# Altium PCB pay-motors-prototype.PcbDoc (part 1 of 2)
Units mm, origin at the board's own origin, x right, y up, seen from the top; angles counter-clockwise.
Board outline 81 x 46.01 mm, 4 copper layers (Top Layer, GND, PWR, Bottom Layer), stack 0.778 mm thick; 77 components, 99 nets, 310 pads, 335 vias.
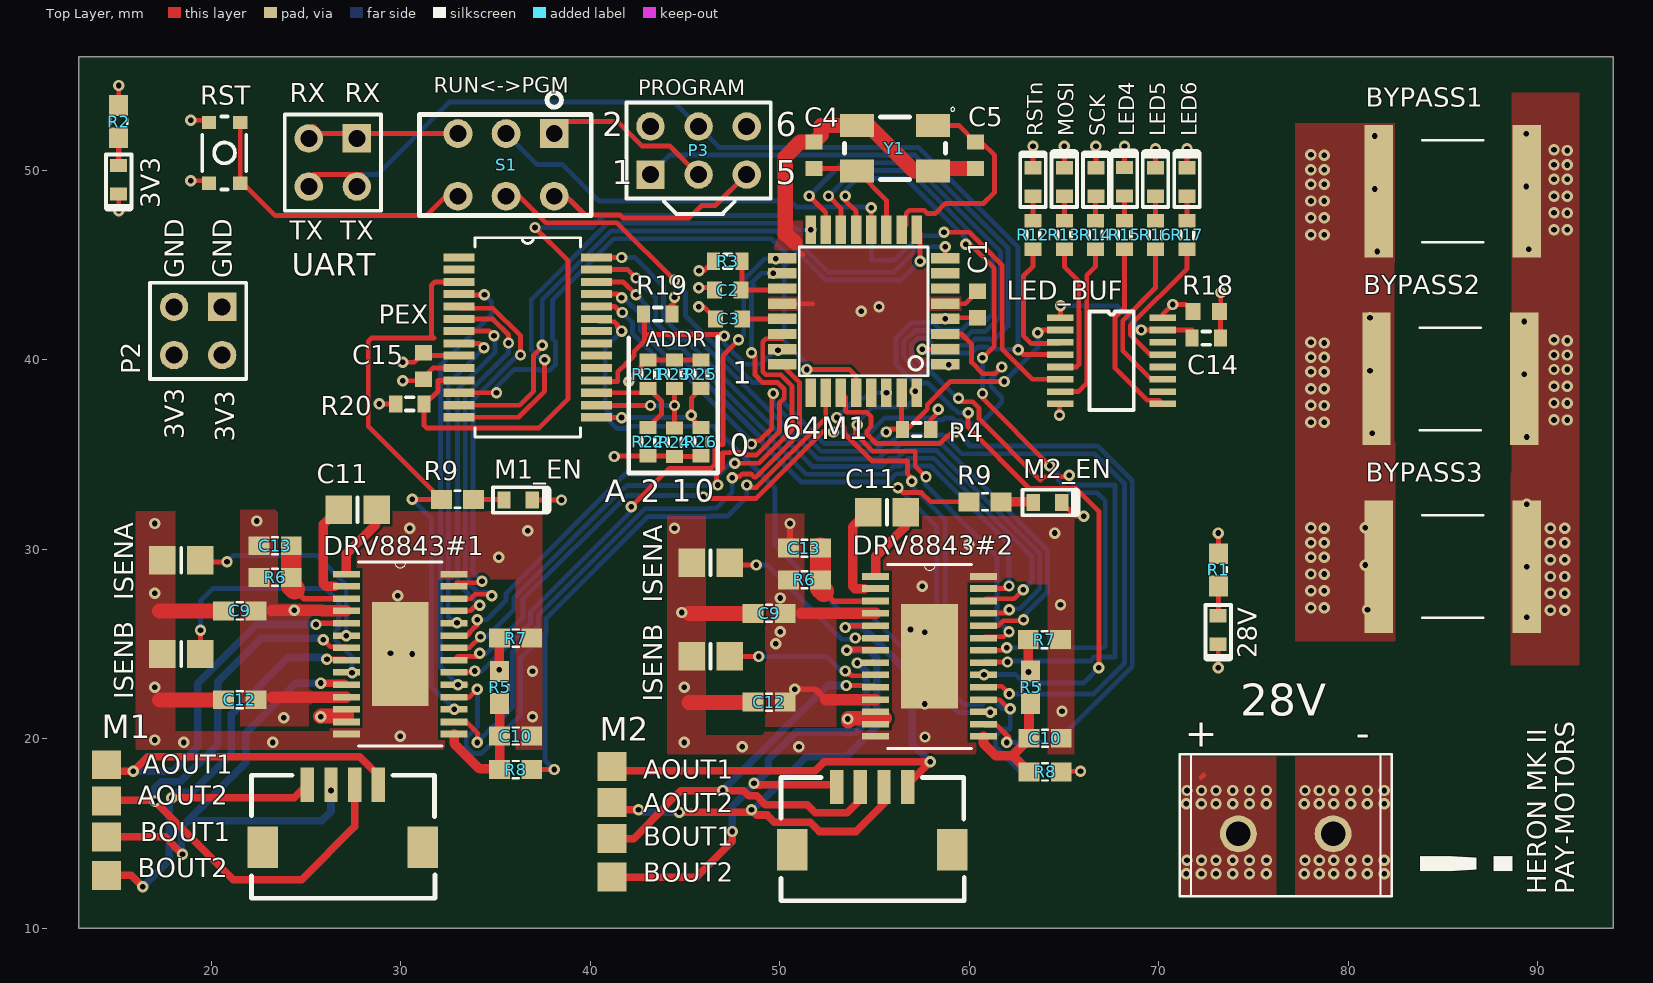
[diagram p0: Top Layer view]
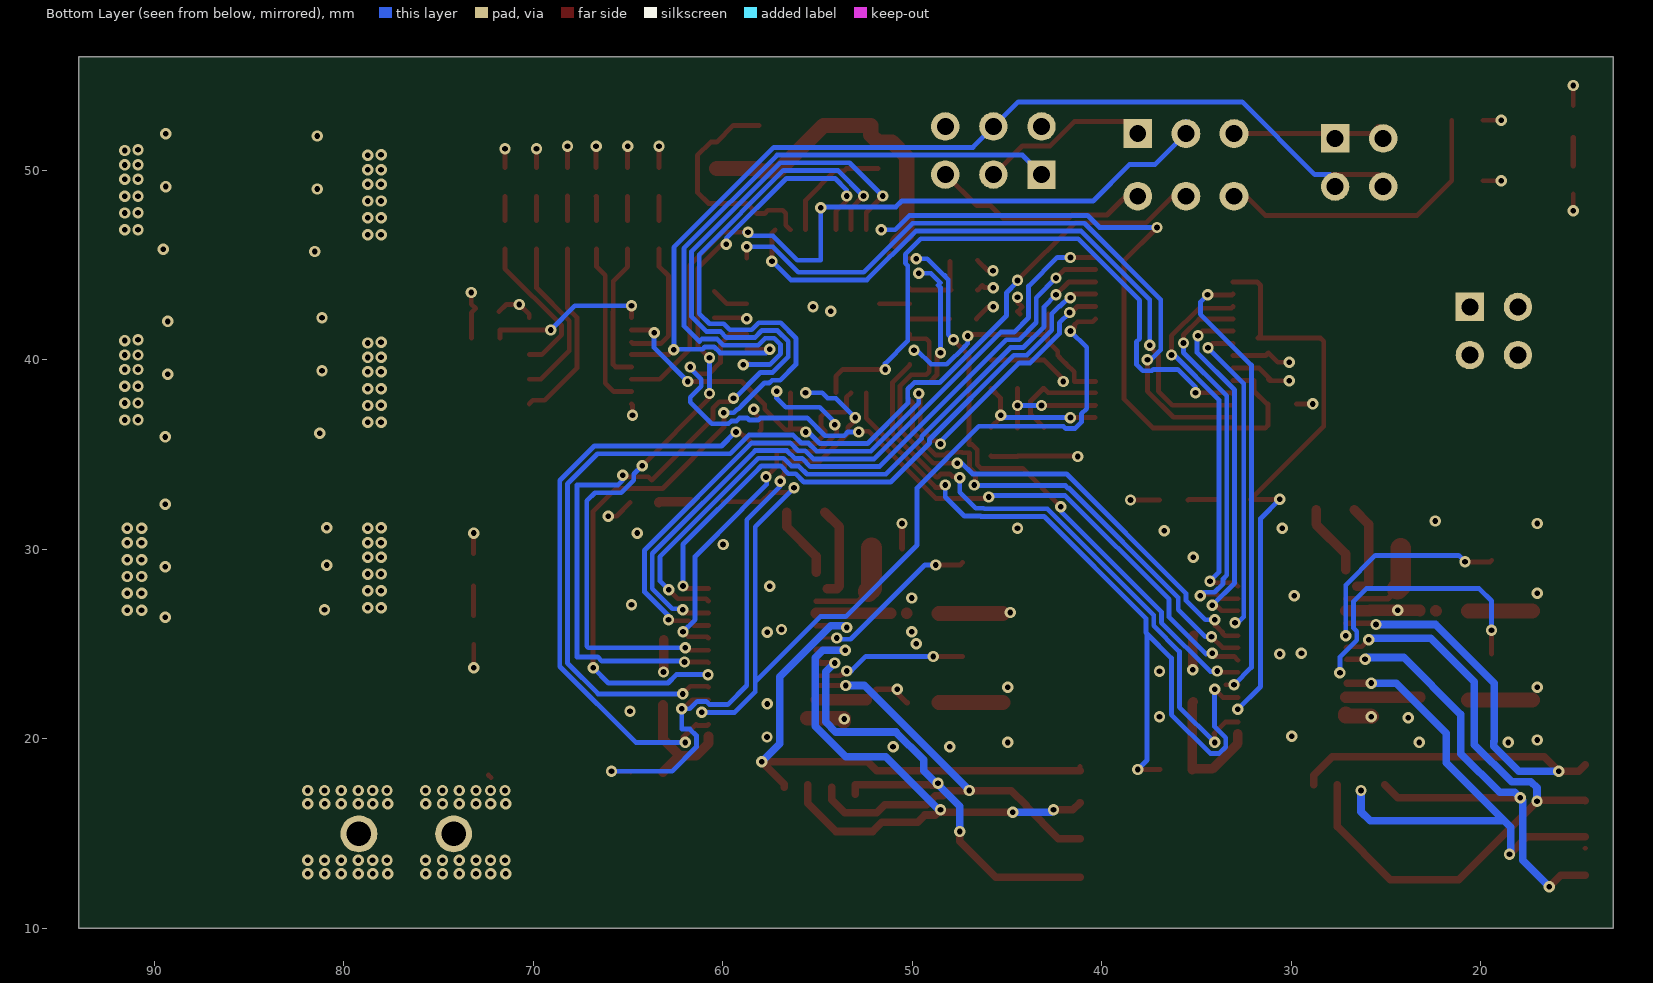
[diagram p1: Bottom Layer view, seen from below]
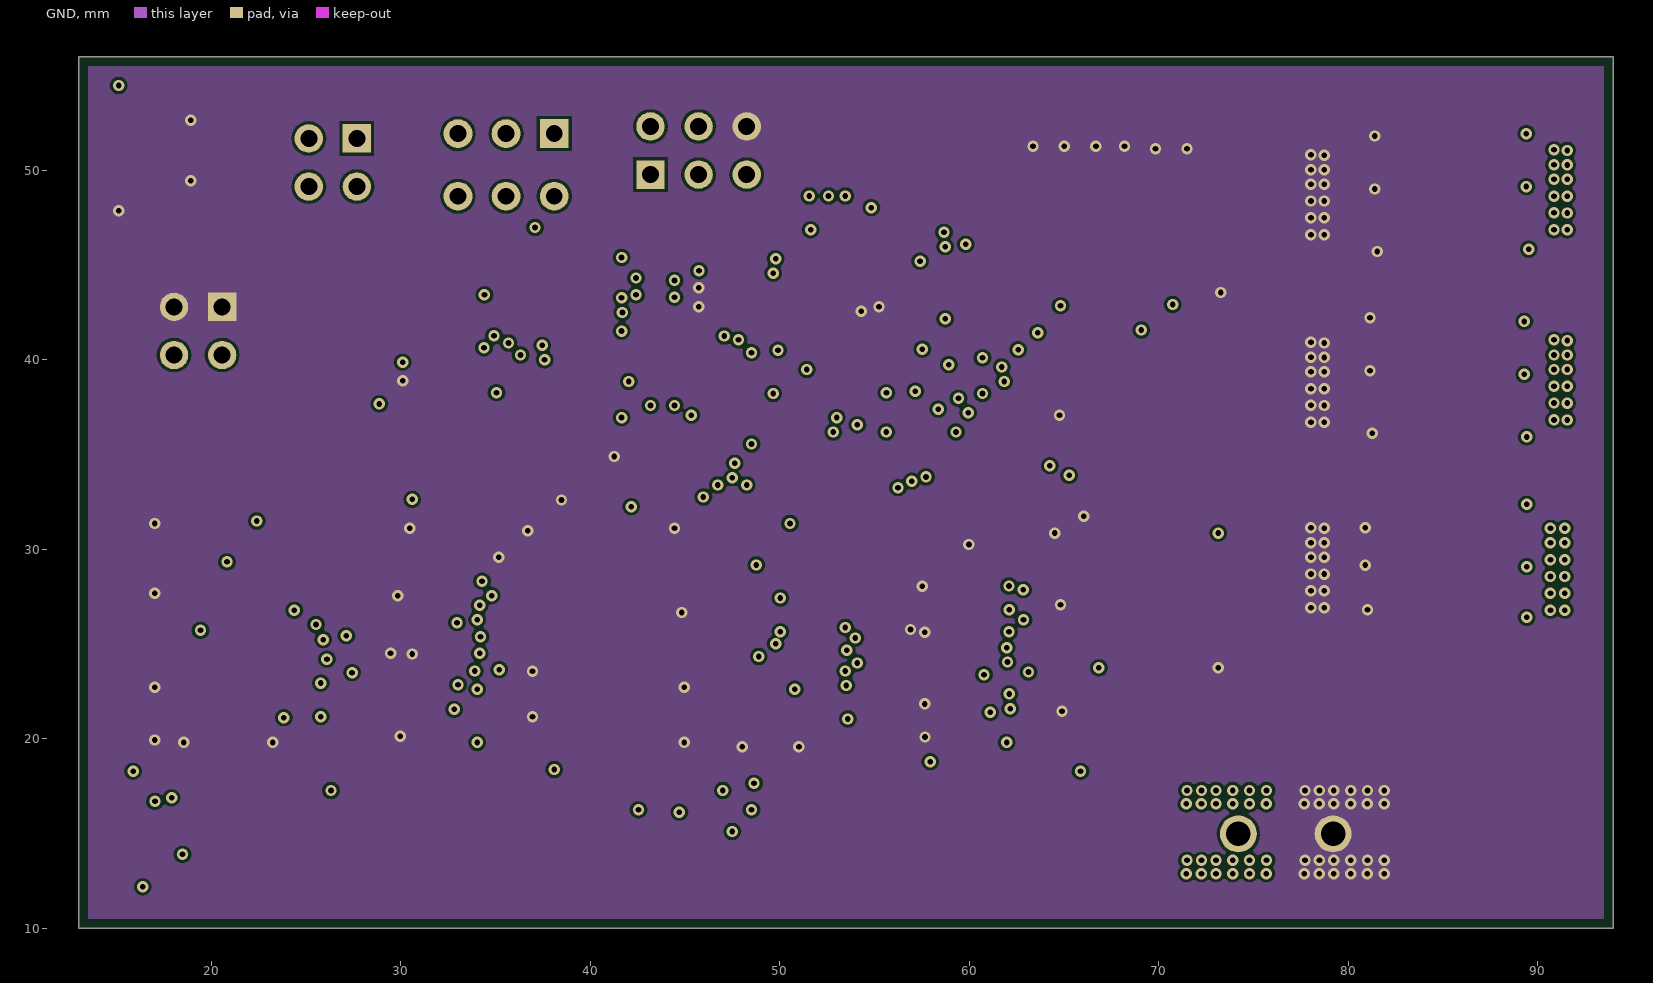
[diagram p2: GND]
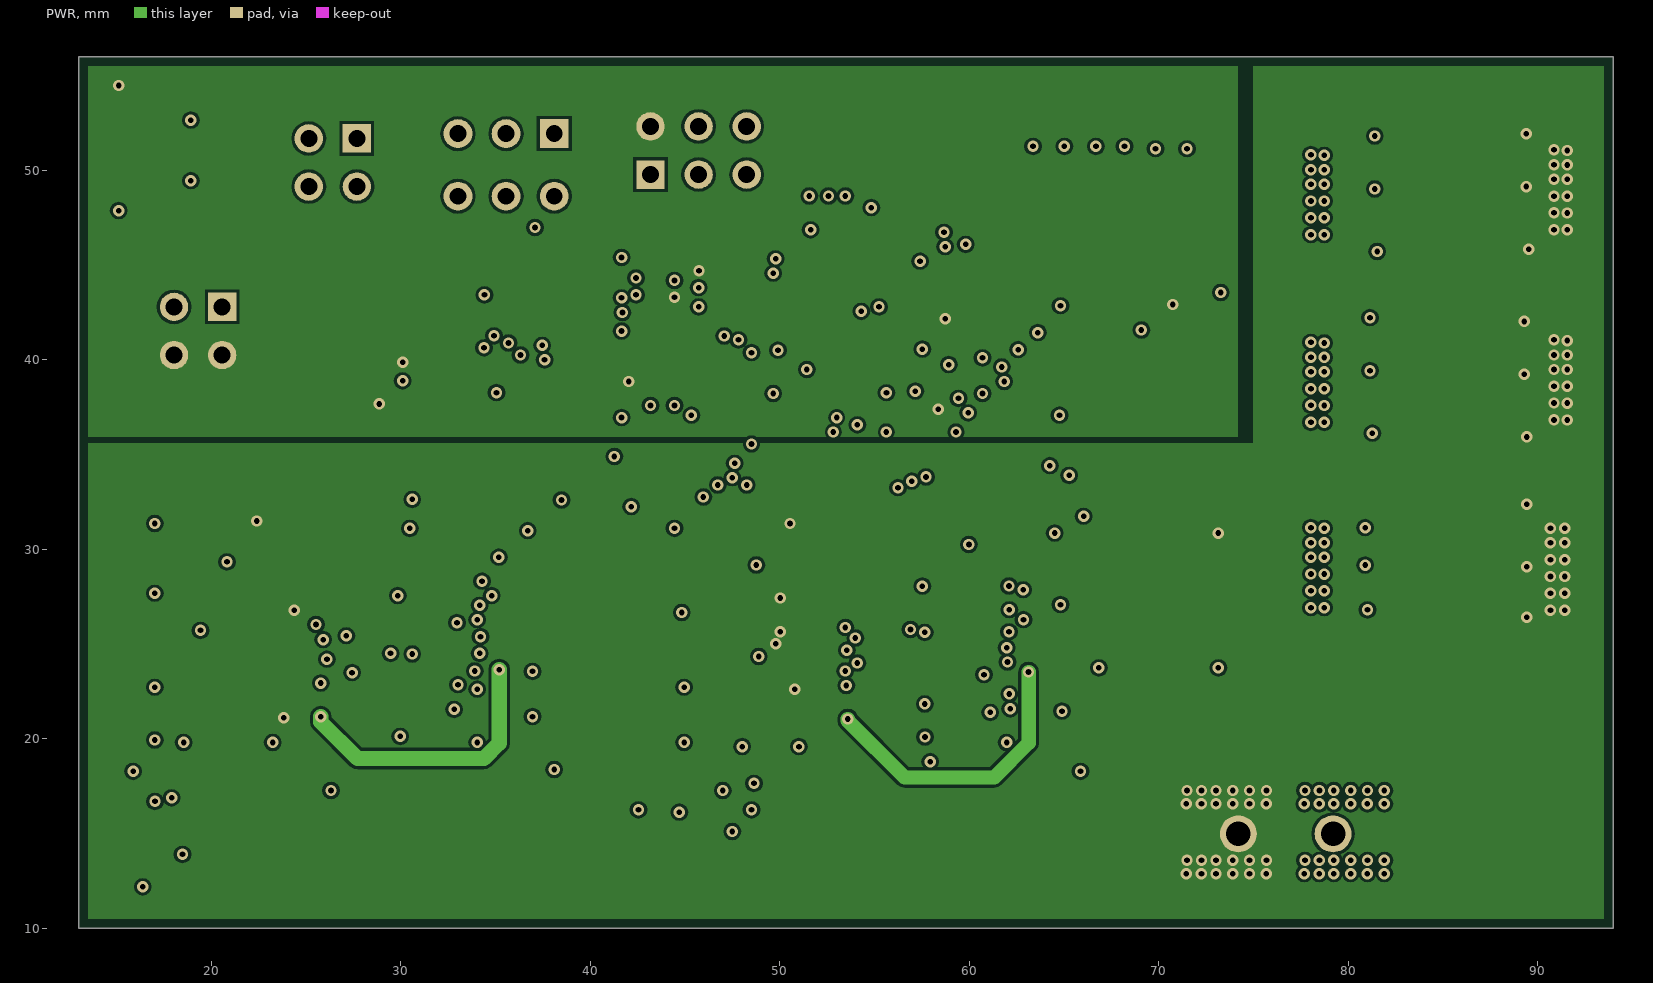
[diagram p3: PWR]

## Layer stack, top to bottom
Top Solder: solder mask 0.0102, Solder Resist, Dk 3.5
Top Layer: signal copper 0.0356
Dielectric 1: core 0.254, FR-4, Dk 4.2
GND: signal copper 0.036
Dielectric 2: prepreg 0.127, Dk 4.2
PWR: signal copper 0.036
Dielectric 3: core 0.254, Dk 4.2
Bottom Layer: signal copper 0.0356
Bottom Solder: solder mask 0.0102, Solder Resist, Dk 3.5

## Board outline
13,56.007 94,56.007 94,10 13,10

## Design rules (kind name [scope] priority, off if disabled: settings)
AssemblyTestPointUsage [All] p1 off:
AssemblyTestpoint [All] p1 off: testpointundercomponent=TRUE minsize=1.016 maxsize=2.54 preferedsize=1.524 minholesize=0 maxholesize=1.016 preferedholesize=0.813 testpointgrid=0.025 usegrid=TRUE gridtolerance=0 allowsidetop=TRUE allowsidebottom=TRUE
BoardOutlineClearance [All] p1: gap=0.5 ignorepadtopadclearanceinfootprint=FALSE
Clearance Component_Clearance [IsComponent vs IsComponent] p1: gap=0.254 ignorepadtopadclearanceinfootprint=FALSE
Clearance [All] p2: gap=0.152 ignorepadtopadclearanceinfootprint=TRUE
FabricationTestPointUsage [All] p1 off: valid=0 allowmultiple=FALSE
FabricationTestpoint [All] p1 off: side=3 testpointundercomponent=FALSE minsize=1.016 maxsize=2.54 preferedsize=1.524 minholesize=0 maxholesize=1.016 preferedholesize=0.813 testpointgrid=0.025 allowsidetop=TRUE allowsidebottom=TRUE usegrid=TRUE gridtolerance=0
HoleSize [All] p1: absolutevalues=TRUE maxlimit=6.3 minlimit=0.3 maxpercent=80.000 minpercent=20.000
HoleToHoleClearance [All] p1: gap=0.2 allowstackedmicrovias=FALSE
MinimumAnnularRing [All] p1: minimumring=0.15
MinimumSolderMaskSliver [All] p1: minsoldermaskwidth=0.1
PlaneClearance [All] p1: clearance=0.381
PlaneConnect [All] p1: planeconnectstyle=Direct reliefexpansion=0.508 reliefentries=4 reliefconductorwidth=0.254 reliefairgap=0.254
PolygonConnect [All] p1: connectstyle=Direct reliefconductorwidth=0.254 reliefentries=4 polygonreliefangle="90 Angle" airgapwidth=0.254
RoutingVias [All] p1: holewidth=0.3 width=0.6 viastyle="Through Hole" minholewidth=0.2 minwidth=0.6 maxholewidth=6.3 maxwidth=10 useviatemplates=TRUE viatemplateguid#1={ACB9D9EC-30E1-44E4-8670-A46DB4D8A4FC} viatemplatename#1=v60h30m0mx0(Tol8-8)
SilkToSilkClearance [All] p1: silktosilkclearance=0
SilkToSolderMaskClearance [IsPad] p1: minsilkscreentomaskgap=0.2 clearancetoexposedcopper=TRUE
SolderMaskExpansion [All] p1: expansion=0.051
UnConnectedPin [All] p1:
UnRoutedNet [All] p1: checkbadconnections=TRUE
Width [All] p1: maxlimit=25.4 minlimit=0.152 preferedwidth=0.2
18 further rules are at their usual default settings.

## Classes and differential pairs
component class DRV8843N2: C9 C10 C11 C12 C12_DRV8843N2 C13 C13_DRV8843N2 DRV8843#2 ISENA ISENB M2 M2_EN R5 R6 R7 R8 R9
component class DRV8843N1: BYPASS2 C9 C10 C11 C12 C12_DRV8843N1 C13 C13_DRV8843N1 DRV8843#1 ISENB M1 M1_EN R5 R6 R7 R8 R9
channel class 28V-motor-driver: 43N1 43N2
component class U_micro-ATMEGA32M1: P3 P4 P? RST RST1 S1 S2 S? UART
component class PEX2: C15 C21 PEX R19 R20 R21 R22 R23 R24 R25 R26 R32 R35 R36 R37 R38 R39 R40 R41 R42 R43 U4_PEX2 U11
component class pay-motors-prototype: 3V3 5 17 23 25 26 27 28V D13 gnd GND1 GND3 GND4 P2 R1 R2 R43
component class micro-circuit-: 9 BUF1 C13 C14 C26 D5 D6 D7 D8 D9 D? LED4 LED5 LED6 LED_BUF MOSI R12 R13 R14 R15 R16 R17 R18 R44 R? RSTn SCK
component class ATMega32M1: 6 C2 C3 C4 C5 C19 C25 C? R3 R4 Y1 Y?

## Components (designator, comment, footprint, x,y, rotation, side; value= is the part's Value field where it differs from the comment)
3V3 "LED2" 0603-LED 15.113,49.512 r270 top (schematic designator D2)
28V "Header 2" CON2_SCREW_5.00MM_691102710002 76.708,14.986 r0 top (schematic designator P1)
28V "LED2" 0603-LED 73.144,25.748 r270 top (schematic designator D1)
64M1 "ATMega32M1" QFP80P900X900X120-32 54.433,42.568 r180 top (schematic designator U1)
BYPASS1 "47uF" "CAP-2 J-lead" 85.598,48.895 r180 top value=0.1uF (schematic designator C8)
BYPASS2 "47uF" "CAP-2 J-lead" 85.471,38.989 r180 top value=0.1uF (schematic designator C6)
BYPASS3 "47uF" "CAP-2 J-lead" 85.598,29.083 r180 top value=0.1uF (schematic designator C7)
C1 "0.1uF" 1608[0603] 60.452,42.926 r270 top
C2 "0.1uF" 1608[0603] 47.258,43.684 r0 top value=100nF
C3 "0.1uF" 1608[0603] 47.32,42.168 r180 top
C4 "15pF 1%" 1608[0603] 51.816,50.8 r270 top value="14pF 1%"
C5 "15pF 1%" 1608[0603] 60.325,50.8 r90 top value="14pF 1%"
C9 "0.1uF" 0603-RES 21.502,26.752 r180 top
C9 "0.1uF" 0603-RES 49.442,26.625 r180 top
C10 "Cap" 0603-RES 64.008,20.033 r0 top value=0.47uF
C10 "Cap" 0603-RES 36.068,20.151 r0 top value=0.47uF
C11 "0805" 6-0805_M 55.665,31.971 r180 top value=0.01uF
C11 "0805" 6-0805_M 27.725,32.098 r180 top value=0.01uF
C12 "Cap" 0603-RES 49.442,21.938 r180 top value=0.1uF
C12 "Cap" 0603-RES 21.502,22.065 r180 top value=0.1uF
C13 "0603" 0603-RES 51.308,30.066 r0 top value=0.01uF
C13 "0603" 0603-RES 23.368,30.193 r0 top value=0.01uF
C14 "0.1uF" 1608[0603] 72.517,42.545 r180 top
C15 "0.1uF" 1608[0603] 31.209,39.679 r90 top
DRV8843#1 "DRV8843" SOP65P640X110-29N 29.972,24.478 r0 top (schematic designator U2)
DRV8843#2 "DRV8843" SOP65P640X110-29N 57.912,24.351 r0 top (schematic designator U2)
ISENA "Res1" 6-0805_M 46.355,29.304 r180 top value=1 (schematic designator R10)
ISENA "Res1" 6-0805_M 18.415,29.431 r180 top value=1 (schematic designator R10)
ISENB "Res1" 6-0805_M 46.355,24.351 r180 top value=1 (schematic designator R11)
ISENB "Res1" 6-0805_M 18.415,24.478 r180 top value=1 (schematic designator R11)
LED4 "" 0603-LED 68.199,49.403 r90 top (schematic designator D7)
LED5 "" 0603-LED 69.835,49.391 r90 top (schematic designator D8)
LED6 "" 0603-LED 71.501,49.391 r90 top (schematic designator D9)
LED_BUF "Hex Buffer" SOP65P640X120-16N 64.819,42.229 r0 top (schematic designator U3)
M1 "Header 4" DF13A-4P-1.25H(51) 28.194,15.621 r180 top (schematic designator P5)
M1_EN "LED2" 0603-LED 36.195,32.606 r0 top (schematic designator D3)
M2 "Header 4" DF13A-4P-1.25H(51) 56.134,15.494 r180 top (schematic designator P5)
M2_EN "LED2" 0603-LED 64.135,32.479 r0 top (schematic designator D3)
MOSI "ORANGE LED" 0603-LED 65.024,49.391 r90 top (schematic designator D5)
P2 "Header 2X2" HDR2X2 20.574,42.799 r180 top
P3 "Header 3X2" HDR2X3 43.18,49.784 r0 top
PEX "MCP23S17" SOP65P780X200-28N 36.703,41.193 r0 top (schematic designator U4)
R1 "Res1" 0603-RES 73.152,28.923 r90 top value=3K
R2 "0603" 0603-RES 15.113,52.578 r90 top value=330
R3 "30K" J1-0603 47.258,45.208 r180 top value=10
R4 "30K" J1-0603 57.226,36.318 r0 top
R5 "Res1" 0603-RES 63.246,22.725 r270 top value=10K
R5 "Res1" 0603-RES 35.219,22.712 r270 top value=10K
R6 "0603" 0603-RES 51.308,28.395 r0 top value=1M
R6 "0603" 0603-RES 23.368,28.522 r0 top value=1M
R7 "Res1" 0603-RES 63.969,25.24 r180 top value=50K
R7 "Res1" 0603-RES 36.068,25.322 r180 top value=50K
R8 "Res1" 0603-RES 64.008,18.255 r180 top value=10K
R8 "Res1" 0603-RES 36.068,18.382 r180 top value=10K
R9 "Res1" 0603-RES 60.837,32.512 r180 top value=330
R9 "Res1" 0603-RES 32.995,32.639 r180 top value=330
R12 "330" J1-0603 63.373,46.597 r270 top
R13 "330" J1-0603 65.024,46.597 r270 top
R14 "330" J1-0603 66.675,46.597 r270 top
R15 "330" J1-0603 68.199,46.597 r270 top
R16 "330" J1-0603 69.835,46.597 r270 top
R17 "330" J1-0603 71.501,46.597 r270 top
R18 "10K" J1-0603 72.517,41.148 r180 top
R19 "10K" J1-0603 43.561,42.418 r0 top
R20 "10k" J1-0603 30.48,37.679 r180 top
R21 "0 Ohm" J1-0603 43.053,39.243 r270 top value=0
R22 "0 Ohm" J1-0603 43.053,35.687 r90 top value=0
R23 "0 Ohm" J1-0603 44.45,39.243 r270 top value=0
R24 "0 Ohm" J1-0603 44.45,35.656 r90 top value=0
R25 "0 Ohm" J1-0603 45.847,39.243 r270 top value=0
R26 "0 Ohm" J1-0603 45.847,35.687 r90 top value=0
RST "SW-PB" "PTS830GM140 SMTR LFS - Pushbutton" 20.701,50.927 r270 top (schematic designator S2)
RSTn "GREEN LED" 0603-LED 63.373,49.391 r90 top (schematic designator D4)
S1 "DPDT" "JS202011AQN - Slide Switch" 35.56,50.292 r270 top
SCK "ORANGE LED" 0603-LED 66.69,49.391 r90 top (schematic designator D6)
UART "Header 2X2" HDR2X2 27.686,51.689 r180 top (schematic designator P4)
Y1 "8MHz Crystal" OSCSC500X320X110-4N 56.083,51.177 r270 top

## Footprints (in the part's own frame and the unit in brackets; to place one, negate y for a bottom-side part, rotate by r counter-clockwise, add the part's x,y. Pads: shape width x height; smd on the part's side, far side on the other; paste and mask are expansions set on the pad)
6-0805_M [mm] "Chip Resistor, Body 2.0x1.2mm, IPC Low Density"
  rect 1.4x1.5 smd: 1(-1,0) 2(1,0)
  silkscreen extent 0,-0.65 0,0.65, body extent -1.07,-0.7 1.07,0.7, height 0.7
0603-LED [mm] "0603 LED footprint, thick line on the cathode"
  rect 0.7x0.9 smd: 1(-0.75,0) 2(0.75,0)
  silkscreen extent -1.32,-0.67 1.5,0.67, body extent -0.8,-0.4 0.8,0.4, height 0.71
0603-RES [mm] "0603 SMD Resistor, based on Vishay CRCW06030000Z0EC"
  rect 1.1x1 smd: 1(-0.85,0) 2(0.85,0)
  silkscreen extent -0.15,-0.45 0.15,0.45, body extent -0.83,-0.48 0.83,0.48, height 0.25
1608[0603] [mm] "Chip Capacitor, Body 1.6x0.8mm, IPC High Density"
  rect 0.8x0.9 smd: 1(-0.7,0) 2(0.7,0)
  body extent -0.87,-0.48 0.87,0.48, height 1.3
"CAP-2 J-lead" [mm] "KTJ500B476M76BFT00, 6.60mm x 7.80mm, Ceramic Capacitor X7R Stacked SMD, 2 J-Lead"
  rect 1.5x7 smd: 1(-3.829,-0.009) 2(3.971,-0.009)
  silkscreen extent -1.54,-2.71 1.68,2.69
CON2_SCREW_5.00MM_691102710002 [mm] "2-Pos Screw terminal 5mm pitch"
  round 1.95 hole 1.3: 1(-2.5,0) 2(2.5,0)
  silkscreen extent -5.6,-3.3 5.6,4.2, body extent -5.98,-3.37 5.22,6.6, height 10.03
DF13A-4P-1.25H(51) [mm] "4 pos, 1.25mm pitch DF13 connector (H125779CT-ND)"
  rect 0.7x1.8 smd: 1(-0.625,-1.956) 2(0.625,-1.956) 3(1.875,-1.956) 4(3.125,-1.956)
  rect 1.6x2.2 smd: ""(-2.975,1.344) ""(5.475,1.344)
  silkscreen extent -3.61,-2.46 6.06,4.04, body extent -3.61,-2.46 6.04,4.04, height 3.58
HDR2X2 [mm] "Connector; Header; 2x2 Position"
  rect 1.5x1.5 hole 0.9: 1(0,0)
  round 1.5 hole 0.9: 2(0,2.54) 3(2.54,0) 4(2.54,2.54)
  silkscreen extent -1.27,-1.27 3.81,3.81
HDR2X3 [mm] "Connector; Header; 3x2 Position"
  rect 1.5x1.5 hole 0.9: 1(0,0)
  round 1.5 hole 0.9: 2(0,2.54) 3(2.54,0) 4(2.54,2.54) 5(5.08,0) 6(5.08,2.54)
  silkscreen extent -1.27,-1.27 6.35,3.81
J1-0603 [mm] "Chip Resistor, Body 1.6x0.8mm, IPC High Density"
  rect 0.7x0.9 smd: 1(-0.75,0) 2(0.75,0)
  silkscreen extent -0.2,-0.35 0.2,0.35, body extent -0.85,-0.48 0.85,0.48, height 0.9
"JS202011AQN - Slide Switch" [mil]
  rect 60x60 hole 35: 1(-65,100)
  round 60 hole 35: 2(-65,0) 3(-65,-100) 4(65,100) 5(65,0) 6(65,-100)
  silkscreen extent -150,-180 105,177, body extent -148,-178 128,176, height 139
OSCSC500X320X110-4N [mm] "ABM3B-8.000MHZ-10-D-1-G-T Abracon 8MHz crystal"
  rect 1.2x1.8 smd: 1(-1.2,2) 2(-1.2,-2) 3(1.2,-2) 4(1.2,2)
  silkscreen extent -2.15,-2.67 1.65,3.15, body extent -1.6,-2.5 1.58,2.5, height 1.1
"PTS830GM140 SMTR LFS - Pushbutton" [mm] "Low profile pushbutton"
  rect 0.7x0.75 smd: 1(-1.6,0.825) 1(1.6,0.825) 2(-1.6,-0.825) 2(1.6,-0.825)
  silkscreen extent -1.92,-1.17 1.92,1.15, body extent -1.75,-1.3 1.75,1.3, height 1.4
QFP80P900X900X120-32 [mm] "QFN + Pitch P + Body With X Body Length X Height - #Pins"
  rect 1.5x0.55 smd: 1(-4.3,2.8) 2(-4.3,2) 3(-4.3,1.2) 4(-4.3,0.4) 5(-4.3,-0.4) 6(-4.3,-1.2) 7(-4.3,-2) 8(-4.3,-2.8) 17(4.3,-2.8) 18(4.3,-2) 19(4.3,-1.2) 20(4.3,-0.4) 21(4.3,0.4) 22(4.3,1.2) 23(4.3,2) 24(4.3,2.8)
  rect 0.55x1.5 smd: 9(-2.8,-4.3) 10(-2,-4.3) 11(-1.2,-4.3) 12(-0.4,-4.3) 13(0.4,-4.3) 14(1.2,-4.3) 15(2,-4.3) 16(2.8,-4.3) 25(2.8,4.3) 26(2,4.3) 27(1.2,4.3) 28(0.4,4.3) 29(-0.4,4.3) 30(-1.2,4.3) 31(-2,4.3) 32(-2.8,4.3)
  silkscreen extent -3.4,-3.4 3.4,3.4, body extent -4.62,-4.62 4.63,4.63, height 1.2
SOP65P640X110-29N [mil] "SOP+Pitch P+Lead Span Nominal X Height - #Pins"
  rect 56x14 smd: 1(-112,166) 2(-112,141) 3(-112,115) 4(-112,90) 5(-112,64) 6(-112,38) 7(-112,13) 8(-112,-13) 9(-112,-38) 10(-112,-64) 11(-112,-90) 12(-112,-115) 13(-112,-141) 14(-112,-166) 15(112,-166) 16(112,-141) 17(112,-115) 18(112,-90) 19(112,-64) 20(112,-38) 21(112,-13) 22(112,13) 23(112,38) 24(112,64) 25(112,90) 26(112,115) 27(112,141) 28(112,166)
  rect 118x217 smd: 29(0,0)
  silkscreen extent -87,-191 87,191
SOP65P640X120-16N [mm] "SOP + Pitch P + Lead Span Nominal X Height - #Pins"
  rect 1.4x0.35 smd: 1(0,0) 2(0,-0.65) 3(0,-1.3) 4(0,-1.95) 5(0,-2.6) 6(0,-3.25) 7(0,-3.9) 8(0,-4.55) 9(5.4,-4.55) 10(5.4,-3.9) 11(5.4,-3.25) 12(5.4,-2.6) 13(5.4,-1.95) 14(5.4,-1.3) 15(5.4,-0.65) 16(5.4,0)
  silkscreen extent 1.53,-4.88 3.87,0.33, body extent -0.61,-4.84 5.99,0.27, height 1.2
SOP65P780X200-28N [mil] "SOP + Pitch P + Lead Span Nominal X Height - #Pins"
  rect 65x17 smd: 1(-143,166) 2(-143,141) 3(-143,115) 4(-143,90) 5(-143,64) 6(-143,38) 7(-143,13) 8(-143,-13) 9(-143,-38) 10(-143,-64) 11(-143,-90) 12(-143,-115) 13(-143,-141) 14(-143,-166) 15(143,-166) 16(143,-141) 17(143,-115) 18(143,-90) 19(143,-64) 20(143,-38) 21(143,-13) 22(143,13) 23(143,38) 24(143,64) 25(143,90) 26(143,115) 27(143,141) 28(143,166)
  silkscreen extent -110,-207 110,207, body extent -161,-207 161,207, height 79

## Part data
3V3 28V M1_EN M2_EN: "Typical RED, GREEN, YELLOW, AMBER GaAs LED", LatestRevisionDate=17-Jul-2002, LatestRevisionNote="Re-released for DXP Platform.", PackageDescription="SM LED; 2 Flat Leads", PackageReference=3.2X1.6X1.1, PackageVersion=Feb-2002, Published=8-Jun-2000, Publisher="Altium Limited"
28V: "Header, 2-Pin", LatestRevisionDate=17-Jul-2002, LatestRevisionNote="Re-released for DXP Platform.", Publisher="Altium Limited"
64M1: "Atmel 8-bit AVR microcontroller.", Supplier Part Number 1=ATMEGA32M1-AURCT-ND, Supplier 1=Digi-Key
BYPASS1 BYPASS2 BYPASS3: library part Cap, "47µF ±20% 50V Ceramic Capacitor X7R Stacked SMD, 2 J-Lead", ComponentLink1Description="Digikey Link", ComponentLink1URL=https://www.digikey.ca/product-detail/en/united-chemi-con/KTJ500B476M76BFT00/565-4687-1-ND/6210741, LatestRevisionDate=17-Jul-2002, LatestRevisionNote="Re-released for DXP Platform.", PackageDescription="Radial Cap, Thru-Hole; 2 Leads; 0.3 in Pin Spacing", PackageReference=RAD-0.3, Published=8-Jun-2000, Publisher="Altium Limited"
C1 C2 C3 C15: library part "Cap Semi", "Capacitor (Semiconductor SIM Model)", Supplier Part Number=587-3807-1-ND, LatestRevisionDate=29-May-2009, LatestRevisionNote="IPC-7351 Footprint Added.", PackageDescription="Chip Capacitor", PackageReference=C1206, Published=8-Jun-2000, Publisher="Altium Limited", Supplier=Digi-Key
C4 C5: library part "Cap Semi", "Capacitor (Semiconductor SIM Model)", Supplier Part Number=490-16416-1-ND, LatestRevisionDate=29-May-2009, LatestRevisionNote="IPC-7351 Footprint Added.", PackageDescription="Chip Capacitor", PackageReference=C1206, Published=8-Jun-2000, Publisher="Altium Limited", Supplier=Digi-Key
C9 C9 C11 C11 C13 C13: library part Cap, "Capacitor", ComponentLink1Description="Digikey Link", LatestRevisionDate=17-Jul-2002, LatestRevisionNote="Re-released for DXP Platform.", PackageDescription="Radial Cap, Thru-Hole; 2 Leads; 0.3 in Pin Spacing", PackageReference=RAD-0.3, Published=8-Jun-2000, Publisher="Altium Limited"
  C9 C9 C13 C13: ComponentLink1URL=https://www.digikey.ca/product-detail/en/yageo/CC0603ZRY5V9BB104/311-1343-1-ND/2103127
  C11 C11: ComponentLink1URL=https://www.digikey.ca/product-detail/en/yageo/CC0805KRX7R9BB103/311-1136-1-ND/303046
C10 C10 C12 C12: "Capacitor", ComponentLink1Description="Digikey Link", LatestRevisionDate=17-Jul-2002, LatestRevisionNote="Re-released for DXP Platform.", PackageDescription="Radial Cap, Thru-Hole; 2 Leads; 0.3 in Pin Spacing", PackageReference=RAD-0.3, Published=8-Jun-2000, Publisher="Altium Limited"
  C10 C10: ComponentLink1URL=https://www.digikey.ca/product-detail/en/taiyo-yuden/JMK107BJ475KA-T/587-1785-1-ND/1212801
  C12 C12: ComponentLink1URL=https://www.digikey.ca/product-detail/en/yageo/CC0603ZRY5V9BB104/311-1343-1-ND/2103127
C14: library part "Cap Semi", "Capacitor (Semiconductor SIM Model)", LatestRevisionDate=29-May-2009, LatestRevisionNote="IPC-7351 Footprint Added.", PackageDescription="Chip Capacitor", PackageReference=C1206, Published=8-Jun-2000, Publisher="Altium Limited"
DRV8843#1 DRV8843#2: "Dual H-Bridge Driver, accept input voltages from 8.2V ~ 45V, with two-bit current control"
ISENA ISENA ISENB ISENB R1 R5 R5 R7 R7 R8 R8 R9 R9: "Resistor", ComponentLink1Description="Digikey Link", LatestRevisionDate=17-Jul-2002, LatestRevisionNote="Re-released for DXP Platform.", PackageDescription="Axial Device, Thru-Hole; 2 Leads; 0.3 in Pin Spacing", PackageReference=AXIAL-0.3, Published=8-Jun-2000, Publisher="Altium Limited"
  ISENA ISENA ISENB ISENB: ComponentLink1URL=https://www.digikey.ca/product-detail/en/yageo/SR0805FR-471RL/YAG5851CT-ND/9373236
  R1: ComponentLink1URL=https://www.digikey.ca/product-detail/en/vishay-beyschlag/MCT06030C3001FP500/MCT0603-3.00K-CFCT-ND/2607899
  R5 R5 R8 R8: ComponentLink1URL=https://www.digikey.ca/product-detail/en/yageo/RT0603DRD0710KL/311-10KDCT-ND/1035680
  R7 R7: ComponentLink1URL=https://www.digikey.ca/product-detail/en/vishay-thin-film/PNM0603E5002BST5/PNM0603-50KBCT-ND/2120388
  R9 R9: ComponentLink1URL=https://www.digikey.ca/product-detail/en/yageo/RC0603FR-07330RL/311-330HRCT-ND/730109
LED4 LED5 LED6 MOSI RSTn SCK: library part LED, "Just a generic LED"
LED_BUF: library part SN74HC365PW, "Hex non-inverting buffer with 3-state outputs. SN74HC365PW.", Supplier Part Number 1=296-33932-5-ND, Supplier 1=Digi-Key
M1 M2: "Header, 4-Pin", LatestRevisionDate=17-Jul-2002, LatestRevisionNote="Re-released for DXP Platform.", Publisher="Altium Limited"
P2 UART: "Header, 2-Pin, Dual row", LatestRevisionDate=17-Jul-2002, LatestRevisionNote="Re-released for DXP Platform.", Publisher="Altium Limited"
P3: "Header, 3-Pin, Dual row. Programming header", LatestRevisionDate=17-Jul-2002, LatestRevisionNote="Re-released for DXP Platform.", Publisher="Altium Limited", Supplier=Digi-Key
PEX: "16 bit I/O expander with SPI interface.", Supplier Part Number 1=MCP23S17-E/SS-ND, Supplier 1=Digi-Key
R2 R6 R6: library part Res1, "Resistor", ComponentLink1Description="Digikey Link", LatestRevisionDate=17-Jul-2002, LatestRevisionNote="Re-released for DXP Platform.", PackageDescription="Axial Device, Thru-Hole; 2 Leads; 0.3 in Pin Spacing", PackageReference=AXIAL-0.3, Published=8-Jun-2000, Publisher="Altium Limited"
  R2: ComponentLink1URL=https://www.digikey.ca/product-detail/en/yageo/RC0603FR-07330RL/311-330HRCT-ND/730109
  R6 R6: ComponentLink1URL=https://www.digikey.ca/product-detail/en/vishay-beyschlag/MCT06030C1004FP500/MCT0603-1.00M-CFCT-ND/2607877
R3 R4 R12 R13 R14 R15 R16 R17 R18 R19 R20 R21 R22 R23 R24 R25 R26: library part Res3, "Resistor", LatestRevisionDate=29-May-2009, LatestRevisionNote="IPC-7351 Footprint Added.", PackageDescription="Chip Resistor", PackageReference=J1-0603, Published=8-Jun-2000, Publisher="Altium Limited"
  R3 R4 R19 R20 R21 R22 R23 R24 R25 R26: Supplier=Digi-Key
RST: library part "Pushbutton - Low Profile", "Schematic symbol for a generic 2-pin pushbutton, OFF-mom."
S1: library part "DPDT Switch", "DPDT Switch, customized for the pinout of the JS202011AQN switch.", Supplier Part Number 1=401-2000-ND, Supplier 1=Digi-Key
Y1: library part AMB3B-8MHz, "8MHz Abracom 4-pin crystal.", Supplier Part Number 1=535-13456-1-ND, Supplier 1=Digi-Key

## Free pads (board coordinates)
  rect 1.524x1.524 smd: 2(14.478,12.794) 2(14.478,14.826) 2(14.478,16.731) 2(14.478,18.636) 2(41.148,12.7) 2(41.148,14.732) 2(41.148,16.637) 2(41.148,18.542)

## Via types
v1: diameter 0.6, hole 0.3, Top Layer to Bottom Layer, tented both sides, 334 vias
v2: diameter 0.6, hole 0.3, Top Layer to Bottom Layer, tented top, 1 vias

## Nets (pads, with @x,y where several pads share a name; then routed paths per layer and width w, separated by ;. In a path a pad name is that pad's centre, name@x,y a point inside that pad or via, vN(x,y) a via of type N, cw(c..) or ccw(c..) an arc to the next point about the centre after c; other vN are vias at no path point)
3V3: 64M1.4 C1.2 C14.2 C15.2 LED_BUF.16 P2.2 P2.4 P3.2 PEX.9 R2.2 R3.2 R4.2 R19.2 R20.2 R21.1 R23.1 R25.1 | length 17
  Top Layer w0.254: R2.2@15.113,53.428 v1(15.113,54.483) ; v1(28.869,37.679) R20.2@29.73,37.679 ; v1(30.099,39.878) 30.708,39.878 C15.2@31.209,40.379 31.36,40.228 PEX.9@33.071,40.228 ; v1(42.037,38.862) 42.037,38.989 43.041,39.993 R21.1@43.053,39.993 R23.1@44.45,39.993 R25.1@45.847,39.993 ; R19.2@44.311,42.418 44.444,42.551 44.196,42.798 44.45,43.052 v2(44.45,43.307) ; v1(45.742,44.704) 46.005,44.704 R3.2@46.508,45.208 R3.2@46.558,45.258 ; R4.2@58.039,36.255 R4.2@57.976,36.318 57.976,36.851 58.367,37.242 v1(58.367,37.403) ; v1(58.733,42.168) 58.733,42.219 58.741,42.226 C1.2@60.452,42.226 ; LED_BUF.16@70.219,42.229 70.219,42.406 v1(70.739,42.926) 71.436,42.926 C14.2@71.817,42.545
3V3OUT_DRV8843N1: C10.1@35.218,20.151 DRV8843#1.15 R5.2@35.219,21.862 R8.2@35.218,18.382 | length 7.5
  Top Layer w0.508: DRV8843#1.15@32.817,20.261 32.817,19.761 34.163,18.415 35.185,18.415 R8.2@35.218,18.382 C10.1@35.218,19.724 ; R5.2@35.179,21.956 35.23,21.905 35.23,19.736 C10.1@35.218,19.724 ; C10.1@35.218,20.16 C10.1@35.218,20.151 C10.1@35.218,19.724
3V3OUT_DRV8843N2: C10.1@63.158,20.033 DRV8843#2.15 R5.2@63.246,21.875 R8.2@63.158,18.255 | length 6.6
  Top Layer w0.2: R5.2@63.158,21.787 R5.2@63.246,21.875
  Top Layer w0.508: DRV8843#2.15@60.757,20.134 60.757,19.761 61.412,19.106 62.307,19.106 ; R8.2@63.158,18.255 62.307,19.106 ; R5.2@63.158,21.787 C10.1@63.158,20.033 63.158,19.995 62.307,19.144 62.307,19.106
28V: 28V.1@74.208,14.986 BYPASS1.1 BYPASS2.1 BYPASS3.1 C9.1 C12.1 C13.1 DRV8843#1.4 DRV8843#1.11 DRV8843#2.4 DRV8843#2.11 R1.2 R6.1 | length 19.9
  Top Layer w0.254: 72.23,17.946 72.373,18.089 ; v1(73.144,30.861) 73.152,30.853 R1.2@73.152,29.773
  Top Layer w0.3: C12.1@50.275,21.9 50.8,22.425 v1(50.8,22.621) 51.879,22.621 52.425,22.075 ; C13.1@50.525,30.05 50.546,30.071 v1(50.546,31.369)
  Top Layer w0.6: C9.1@22.352,26.752 C9.1@22.364,26.764 ; 23.202,22.192 DRV8843#1.11@27.127,22.192 ; 23.202,26.764 23.226,26.787 v1(24.384,26.787) 25.839,26.787 25.862,26.764 DRV8843#1.4@27.127,26.764 ; C9.1@50.292,26.625 C9.1@50.304,26.637 ; 51.142,26.637 DRV8843#2.4@55.067,26.637 ; 52.433,22.065 DRV8843#2.11@55.067,22.065
  other v1: 71.464,12.887 72.259,12.887 73.025,12.887 73.91,12.887 74.795,12.887 75.688,12.887 71.501,13.589 72.263,13.589 73.025,13.589 73.914,13.589 74.799,13.589 75.692,13.589 71.464,16.57 72.259,16.57 73.025,16.57 73.91,16.57 74.795,16.57 75.688,16.57 71.501,17.272 72.263,17.272 73.025,17.272 73.914,17.272 74.799,17.272 75.692,17.272 23.829,21.115 49.784,25.019 50.038,25.654 89.427,26.412 90.678,26.793 91.44,26.793 50.038,27.432 90.678,27.686 91.44,27.686 90.678,28.571 91.44,28.571 89.427,29.088 90.678,29.46 91.44,29.456 90.678,30.349 91.44,30.349 90.678,31.111 91.44,31.111 22.402,31.496 89.427,32.381 89.427,35.937 90.865,36.834 91.567,36.83 90.865,37.727 91.567,37.723 90.865,38.612 91.567,38.608 89.3,39.239 90.865,39.497 91.567,39.497 90.865,40.263 91.567,40.259 91.567,41.021 90.865,41.058 89.3,42.033 89.535,45.847 90.865,46.867 91.567,46.863 90.865,47.76 91.567,47.756 90.865,48.645 91.567,48.641 89.408,49.149 90.865,49.53 91.567,49.53 90.865,50.296 91.567,50.292 91.567,51.054 90.865,51.091 89.408,51.943
A0: PEX.15 R25.2 R26.2 | length 7.5
  Top Layer w0.254: PEX.15@40.355,36.957 v1(41.656,36.957) ; R26.2@45.847,36.437 45.339,36.945 v1(45.339,37.084) 45.339,37.985 R25.2@45.847,38.493
  Bottom Layer w0.254: v1(41.656,36.957) 45.212,36.957 v1(45.339,37.084)
A1: PEX.16 R23.2 R24.2 | length 6.2
  Top Layer w0.254: PEX.16@40.335,37.612 40.355,37.592 v1(43.18,37.592) ; R24.2@44.45,36.406 v1(44.45,37.592) ; v1@44.45,37.612 R23.2@44.45,38.493
  Bottom Layer w0.254: v1(43.18,37.592) v1(44.45,37.592)
A2: PEX.17 R21.2 R22.2 | length 5.5
  Top Layer w0.254: PEX.17@40.335,38.272 42.832,38.272 R21.2@43.053,38.493 43.098,38.493 43.759,37.832 43.759,37.143 R22.2@43.053,36.437
AI0_DRV8843N1: DRV8843#1.24 PEX.8 | length 17.2
  Top Layer w0.254: DRV8843#1.24@32.817,26.103 32.847,26.073 32.907,26.133 v1(32.969,26.133) ; PEX.8@33.071,40.863 34.174,40.863 v1(34.397,40.64)
  Bottom Layer w0.254: v1(32.969,26.133) 32.938,26.133 32.877,26.073 32.512,26.438 32.512,38.755 v1(34.397,40.64)
AI0_DRV8843N2: DRV8843#2.24 PEX.28 | length 38.3
  Top Layer w0.254: PEX.28@40.335,45.41 v1(41.656,45.41) ; DRV8843#2.24@60.757,25.976 61.536,25.976 61.795,26.235 62.811,26.235 v1(62.865,26.289)
  Bottom Layer w0.254: v1(41.656,45.41) 42.347,45.41 43.861,43.896 43.861,42.239 44.632,41.468 45.328,41.468 52.019,34.777 55.221,34.777 55.653,35.209 56.034,35.209 56.448,35.623 58.465,35.623 64.135,29.953 64.135,27.756 62.865,26.486 v1(62.865,26.289)
AI1_DRV8843N1: DRV8843#1.25 PEX.7 | length 19
  Top Layer w0.254: DRV8843#1.25@32.817,26.764 33.682,26.764 33.969,27.051 v1(34.163,27.051) ; PEX.7@33.071,41.523 34.677,41.523 v1(34.925,41.275)
  Bottom Layer w0.254: v1(34.163,27.051) 34.163,27.054 32.995,28.222 32.995,38.418 34.977,40.4 34.977,41.223 v1(34.925,41.275)
AI1_DRV8843N2: DRV8843#2.25 PEX.27 | length 36.5
  Top Layer w0.254: PEX.27@40.335,44.775 41.966,44.775 v1(42.418,44.323) ; DRV8843#2.25@60.757,26.637 61.622,26.637 61.627,26.641 61.947,26.641 v1(62.12,26.814)
  Bottom Layer w0.254: v1(42.418,44.323) 43.455,43.286 43.455,41.974 44.367,41.062 45.044,41.062 51.735,34.371 55.389,34.371 55.821,34.803 56.203,34.803 56.617,35.217 58.296,35.217 63.729,29.785 63.729,27.924 62.673,26.868 62.174,26.868 v1(62.12,26.814) v1@62.106,26.814
AIN1_DRV8843N1: 64M1.3 DRV8843#1.21 | length 42.9
  Top Layer w0.254: DRV8843#1.21@32.817,24.147 33.02,24.351 34.003,24.351 v1(34.163,24.511) ; v1(45.974,32.766) 46.045,32.695 48.767,32.695 52.306,36.234 52.793,36.234 v1(52.832,36.195) ; 64M1.3@58.826,41.275 64M1.3@58.733,41.368 59.597,41.368 60.127,40.838 60.127,39.871 60.729,39.268 61.362,39.268 v1(61.722,39.629)
  Bottom Layer w0.254: v1(34.163,24.511) 34.446,24.511 34.495,24.462 36.449,26.416 36.449,27.362 41.924,32.837 45.831,32.837 45.903,32.766 v1(45.974,32.766) ; v1(52.832,36.195) 53.404,36.195 53.602,35.997 54.608,35.997 55.553,36.941 58.01,36.941 58.127,36.824 58.607,36.824 58.725,36.941 59.116,36.941 59.282,36.774 59.561,36.774 59.704,36.632 60.584,36.632 61.722,37.77 61.722,38.03 61.143,38.61 61.143,38.975 61.722,39.554 v1(61.722,39.629)
AIN1_DRV8843N2: 64M1.15 DRV8843#2.21 | length 55.9
  Top Layer w0.254: v1(51.562,48.653) 52.433,47.782 64M1.15@52.433,46.868 ; v1(59.436,37.973) 59.619,37.79 60.184,37.79 60.523,37.451 60.523,36.886 63.754,33.655 63.937,33.838 65.207,33.838 v1(65.278,33.909) ; DRV8843#2.21@60.757,24.02 60.792,24.055 v1(62.023,24.055)
  Bottom Layer w0.254: v1(51.562,48.653) 53.316,50.407 56.972,50.407 61.65,45.729 61.65,42.279 60.874,41.503 60.129,41.503 59.809,41.182 58.311,41.182 57.939,41.554 57.123,41.554 56.545,40.976 56.545,40.16 57.366,39.338 58.013,39.338 59.379,37.973 v1(59.436,37.973) ; v1(62.023,24.055) 62.075,24.108 66.388,24.108 66.608,24.328 67.691,24.328 67.691,33.401 65.532,33.401 65.278,33.655 v1(65.278,33.909)
AIN1_M2: 64M1.32 DRV8843#2.23 | length 22
  Top Layer w0.254: v1(54.102,36.576) 54.011,36.576 53.983,36.603 53.983,36.12 54.922,35.182 57.15,35.182 57.15,34.394 v1(57.72,33.825) ; DRV8843#2.23@60.757,25.316 60.828,25.387 61.836,25.387 v1(62.103,25.654)
  Bottom Layer w0.254: v1(54.102,36.576) 54.102,36.722 54.886,37.506 56.683,37.506 57.161,37.984 v1(57.161,38.353) ; v1@57.715,33.655 v1@57.875,33.815 ; v1(62.103,25.654) 61.468,26.289 61.468,29.625 58.991,32.102 58.991,32.125 57.687,33.43 57.687,33.626 v1@57.875,33.815 ; v1@57.866,33.825 v1(57.72,33.825) v1@57.866,33.825 ; v1@57.866,33.825 v1@57.875,33.815 ; v1@57.866,33.825 v1@57.875,33.815
AIN2_DRV8843N1: 64M1.17 DRV8843#1.20 | length 31.8
  Top Layer w0.254: DRV8843#1.20@32.817,23.512 33.978,23.512 v1(33.909,23.581) ; v1(42.164,32.258) 44.182,34.276 46.382,34.276 46.576,34.471 46.576,35.271 46.836,35.53 47.004,35.53 47.004,40.216 47.823,41.035 v1(47.823,41.058) ; v1(49.784,45.339) 49.813,45.368 64M1.17@50.133,45.368
  Bottom Layer w0.254: v1(33.909,23.581) 33.909,23.558 34.278,23.558 36.855,26.136 36.855,26.705 42.134,31.983 42.134,32.288 v1(42.164,32.258) ; v1@47.961,41.195 48.108,41.342 48.108,44.237 48.26,44.39 48.26,44.45 48.32,44.45 49.209,45.339 v1(49.784,45.339)
AIN2_DRV8843N2: 64M1.14 DRV8843#2.20 | length 52.8
  Top Layer w0.254: v1(52.578,48.653) 53.233,47.998 64M1.14@53.233,46.868 ; v1(59.944,37.211) 59.944,36.449 63.185,33.208 65.655,33.208 66.848,32.015 v1(66.848,23.749)
  Bottom Layer w0.254: v1(52.578,48.653) 53.926,50.001 56.804,50.001 61.244,45.561 61.244,42.448 60.705,41.909 59.961,41.909 59.64,41.589 58.479,41.589 58.108,41.96 56.954,41.96 56.139,41.145 56.139,39.766 56.973,38.932 57.401,38.932 57.551,38.782 57.807,38.782 58.857,37.733 59.196,37.394 59.238,37.394 59.421,37.211 v1(59.944,37.211) ; v1(60.784,23.39) 62.454,23.39 62.895,22.949 66.048,22.949 v1(66.848,23.749)
AIN2_M2: 64M1.13 DRV8843#2.22 | length 42.9
  Top Layer w0.254: v1(53.467,48.653) 53.467,48.405 54.033,47.838 64M1.13@54.033,46.868 ; v1(59.817,46.101) 60.062,46.101 61.32,44.842 61.32,40.725 v1(60.706,40.111) ; v1(60.706,38.227) 60.706,37.973 v1(64.262,34.417) ; DRV8843#2.22@60.757,24.681 61.849,24.681 v1(61.976,24.808)
  Bottom Layer w0.254: v1(53.467,48.653) 53.467,48.967 54.076,49.577 56.653,49.577 59.817,46.412 v1(59.817,46.101) ; v1(60.706,38.227) v1(60.706,40.111) v1@60.757,40.162 ; v1(61.976,24.808) 67.099,24.808 67.183,24.892 67.183,32.558 66.746,32.995 65.364,32.995 64.699,33.66 64.699,33.98 v1(64.262,34.417)
AOUT1_DRV8843N1: DRV8843#1.5 M1.1 pad.2@14.478,18.636 | length 32.2
  Top Layer w0.152: v1(25.527,26.035) v1@25.527,26.103
  Top Layer w0.3: v1@25.527,26.103 DRV8843#1.5@27.127,26.103
  Top Layer w0.4: pad.2@14.478,18.636 14.826,18.288 v1(15.875,18.288) 16.637,19.05 17.399,19.05 22.479,19.05 27.844,19.05 28.819,18.075 M1.1@28.819,17.577
  Bottom Layer w0.4: v1(15.875,18.288) 17.987,18.288 19.304,19.605 19.304,19.867 19.287,19.884 19.287,21.082 19.287,22.936 22.385,26.035 v1(25.527,26.035)
AOUT1_DRV8843N2: DRV8843#2.5 M2.1 pad.2@41.148,18.542 | length 30.3
  Top Layer w0.152: v1(53.467,25.875) v1@53.467,25.976
  Top Layer w0.254: pad.2@41.148,18.325 pad.2@41.148,18.542
  Top Layer w0.3: v1@53.467,25.976 DRV8843#2.5@55.067,25.976
  Top Layer w0.4: pad.2@41.148,18.325 51.887,18.325 52.358,18.796 v1(57.945,18.796) 56.759,17.61 M2.1@56.759,17.45
  Bottom Layer w0.4: v1(53.467,25.875) 53.567,25.974 54.307,25.974 57.006,23.276 57.006,19.736 v1(57.945,18.796)
AOUT2_DRV8843N1: DRV8843#1.7 M1.2 pad.2@14.478,16.731 | length 34.4
  Top Layer w0.254: v1(25.908,25.24) 26.284,24.863 27.072,24.863 DRV8843#1.7@27.127,24.808
  Top Layer w0.4: pad.2@14.478,16.731 14.511,16.764 16.966,16.764 v1(17.029,16.7) 21.157,12.573 22.732,12.573 24.765,12.573 27.569,15.377 M1.2@27.569,17.577
  Bottom Layer w0.4: v1(17.029,16.7) 17.029,17.41 17.355,17.736 18.371,17.736 20.337,19.702 20.337,23.004 22.649,25.316 23.749,25.316 25.832,25.316 v1(25.908,25.24)
AOUT2_DRV8843N2: DRV8843#2.7 M2.2 pad.2@41.148,16.637 | length 31.8
  Top Layer w0.3: v1@53.794,24.72 55.028,24.72 DRV8843#2.7@55.067,24.681
  Top Layer w0.4: pad.2@41.148,16.637 41.529,16.256 v1(42.545,16.256) ; v1(44.704,16.129) 48.387,16.129 v1(48.514,16.256) 48.789,15.981 49.334,15.981 49.713,15.602 51.605,15.602 52.094,15.113 54.03,15.113 55.509,16.592 M2.2@55.509,17.45 M2.2@55.509,17.577
  Bottom Layer w0.254: v1(42.545,16.256) v1@42.672,16.129
  Bottom Layer w0.4: v1@42.672,16.129 v1(44.704,16.129) ; v1(48.514,16.256) 48.602,16.256 51.396,19.05 53.513,19.05 55.127,20.664 55.127,24.291 54.737,24.681 54.274,24.681 54.263,24.67 53.554,24.67 v1(53.543,24.681)
AVREF_DRV8843N1: DRV8843#1.12 DRV8843#1.13 R5.1@35.219,23.562 R7.2@35.218,25.322 | length 17.9
  Top Layer w0.508: R5.1@35.155,23.749 35.201,23.795 35.201,25.414 R7.2@35.155,25.46
  Top Layer w0.8: v1(25.781,21.176) 25.805,21.2 27.127,21.2 27.127,21.303
  PWR w0.8: v1(25.781,21.176) 25.781,20.896 27.718,18.96 34.389,18.96 35.195,19.765 v1(35.195,23.656) v1@35.195,23.669
AVREF_DRV8843N2: DRV8843#2.12 DRV8843#2.13 R5.1@63.246,23.575 R7.2@63.119,25.24 | length 19.2
  Top Layer w0.508: R5.1@63.119,23.529 R7.2@63.119,25.24
  Top Layer w0.762: v1@53.62,20.934 53.62,21.082 55.55,21.082
  PWR w0.762: v1(53.6,21.05) 53.6,20.954 56.592,17.963 61.317,17.963 63.135,19.781 v1(63.135,23.529)
BI0_DRV8843N1: DRV8843#1.26 PEX.6 | length 20.7
  Top Layer w0.254: DRV8843#1.26@32.817,27.399 33.691,27.399 33.923,27.63 34.727,27.63 v1(34.798,27.559) ; PEX.6@33.071,42.158 34.861,42.158 35.687,41.332 v1(35.687,40.894)
  Bottom Layer w0.254: v1(34.798,27.559) 34.615,27.742 34.05,27.742 33.598,28.194 33.598,28.439 33.401,28.635 33.401,38.1 35.687,40.386 v1(35.687,40.894)
BI0_DRV8843N2: DRV8843#2.26 PEX.26 | length 34.7
  Top Layer w0.254: PEX.26@40.335,44.114 41.738,44.114 v1(42.418,43.434) ; DRV8843#2.26@60.757,27.272 60.879,27.394 62.379,27.394 v1(62.855,27.87)
  Bottom Layer w0.254: v1(42.418,43.434) 43.048,42.804 43.048,41.757 44.149,40.656 44.812,40.656 49.5,35.968 49.5,35.86 51.395,33.965 55.557,33.965 55.989,34.396 56.371,34.396 56.785,34.811 58.128,34.811 63.322,29.616 63.322,28.337 v1(62.855,27.87)
BI1_DRV8843N1: DRV8843#1.27 PEX.5 | length 19.7
  Top Layer w0.254: DRV8843#1.27@32.817,28.059 32.995,28.237 34.206,28.237 v1(34.29,28.321) ; PEX.5@33.071,42.819 33.162,42.728 34.867,42.728 36.322,41.272 v1(36.322,40.259)
  Bottom Layer w0.254: v1(34.29,28.321) 33.818,28.793 33.818,37.895 36.182,40.259 v1(36.322,40.259)
BI1_DRV8843N2: DRV8843#2.27 PEX.25 | length 32.2
  Top Layer w0.254: PEX.25@40.335,43.479 41.455,43.479 v1(41.656,43.278) ; DRV8843#2.27@60.757,27.932 61.968,27.932 v1(62.103,28.067)
  Bottom Layer w0.254: v1(41.656,43.278) 41.755,43.278 42.178,42.855 42.213,42.855 42.642,42.426 42.642,41.571 43.942,40.271 43.942,40.249 44.644,40.249 49.093,35.8 49.093,35.606 51.141,33.558 55.726,33.558 56.158,33.99 56.539,33.99 56.953,34.404 57.96,34.404 58.285,34.079 62.104,30.26 v1(62.103,28.067)